# Altium PCB Intelligent_Agriculture_Power.PcbDoc
Units mil, origin at the board's own origin, x right, y up, seen from the top; angles counter-clockwise.
Board outline 3925 x 3925 mil, 2 copper layers (Top Layer, Bottom Layer); 35 components, 24 nets, 96 pads, 10 vias.
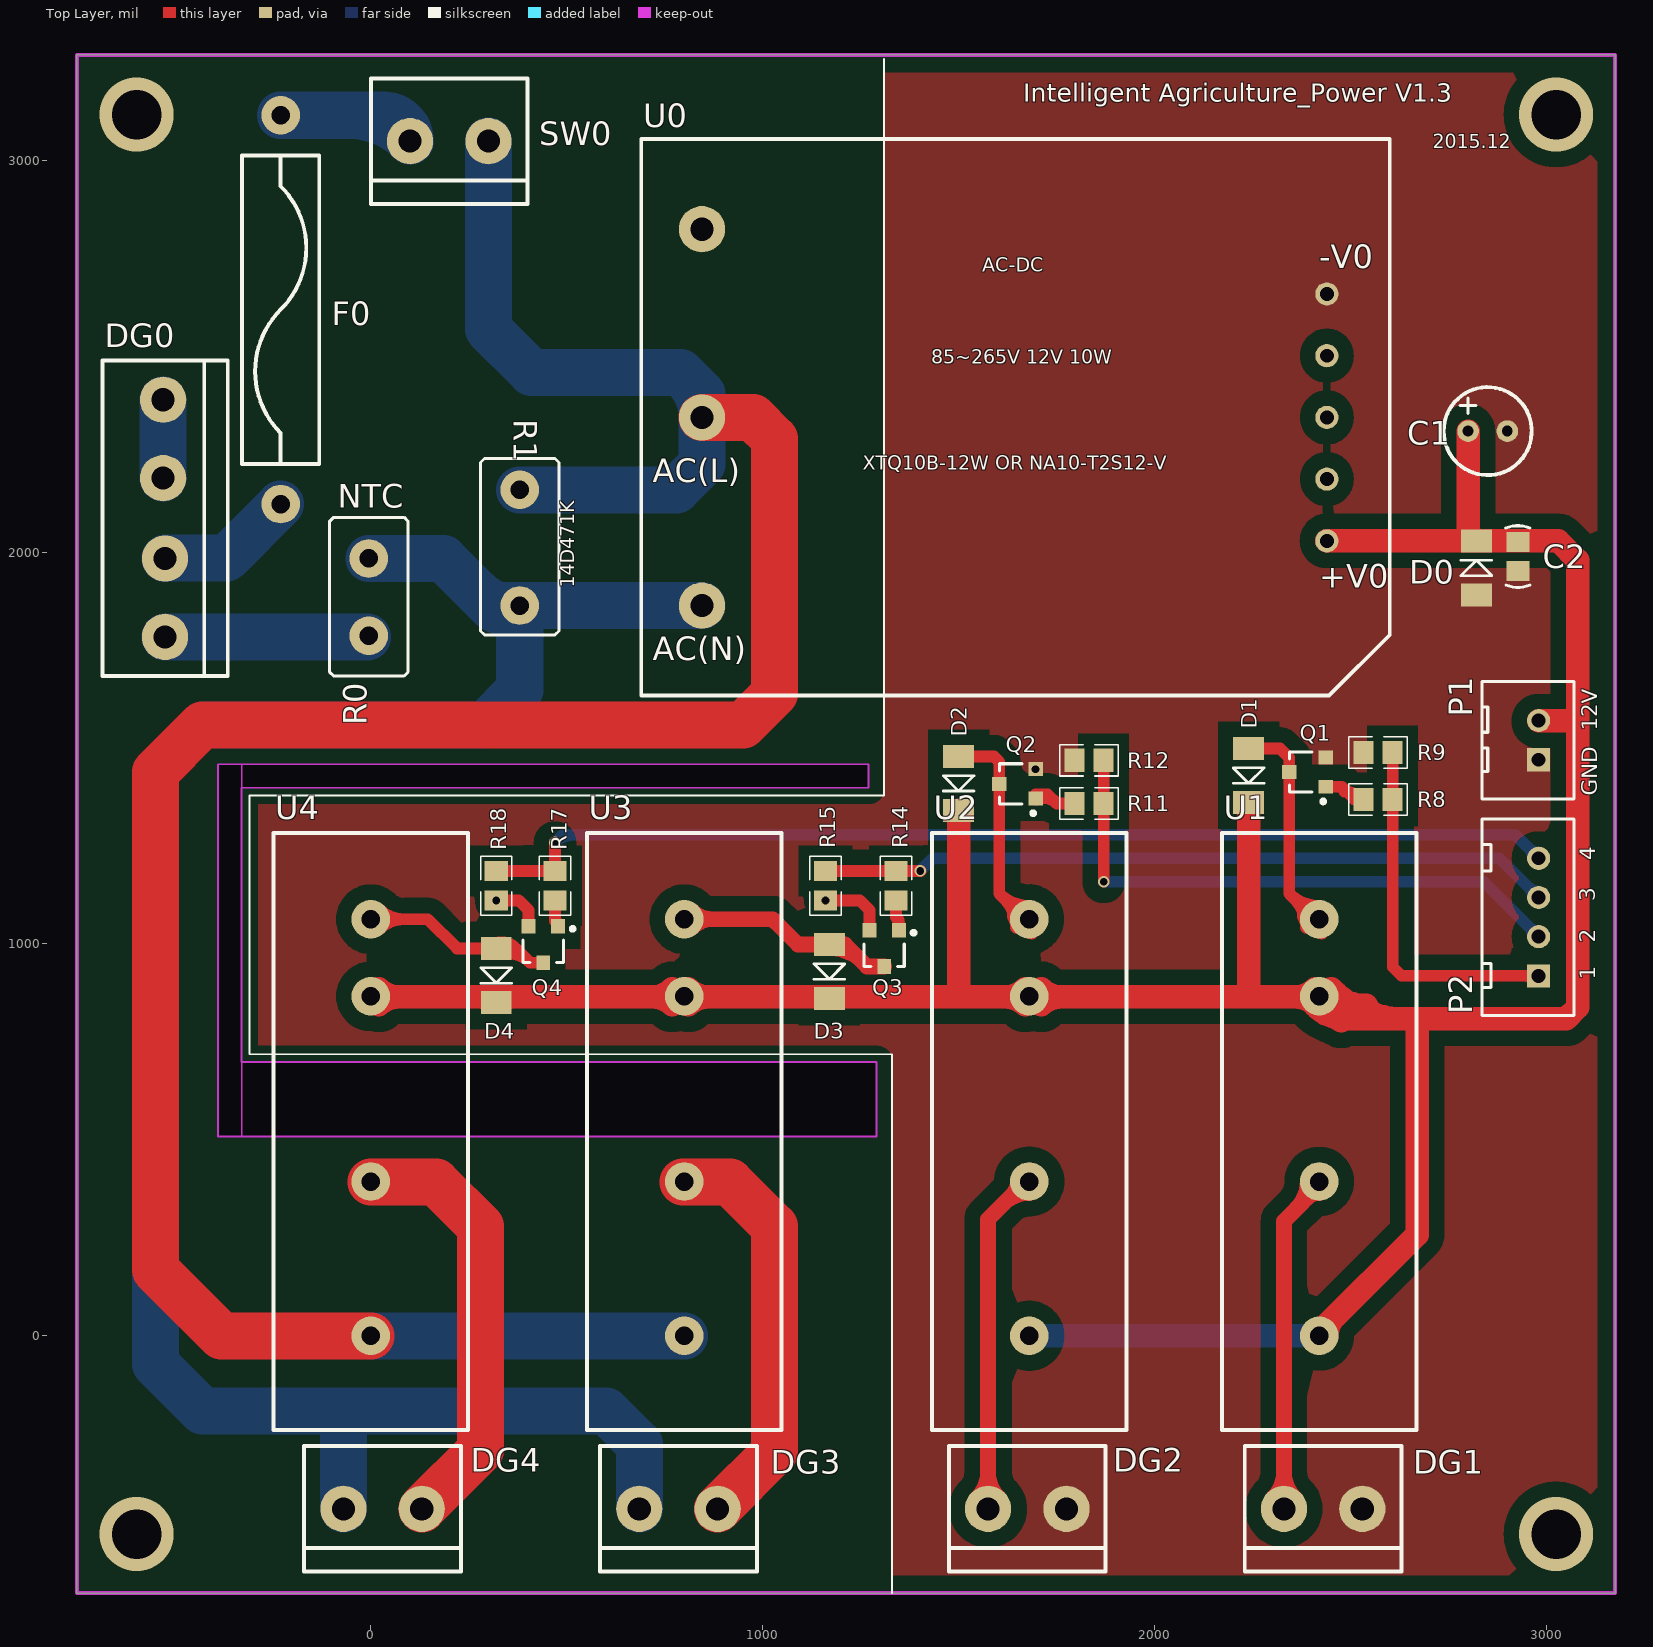
[diagram p0: Top Layer view]
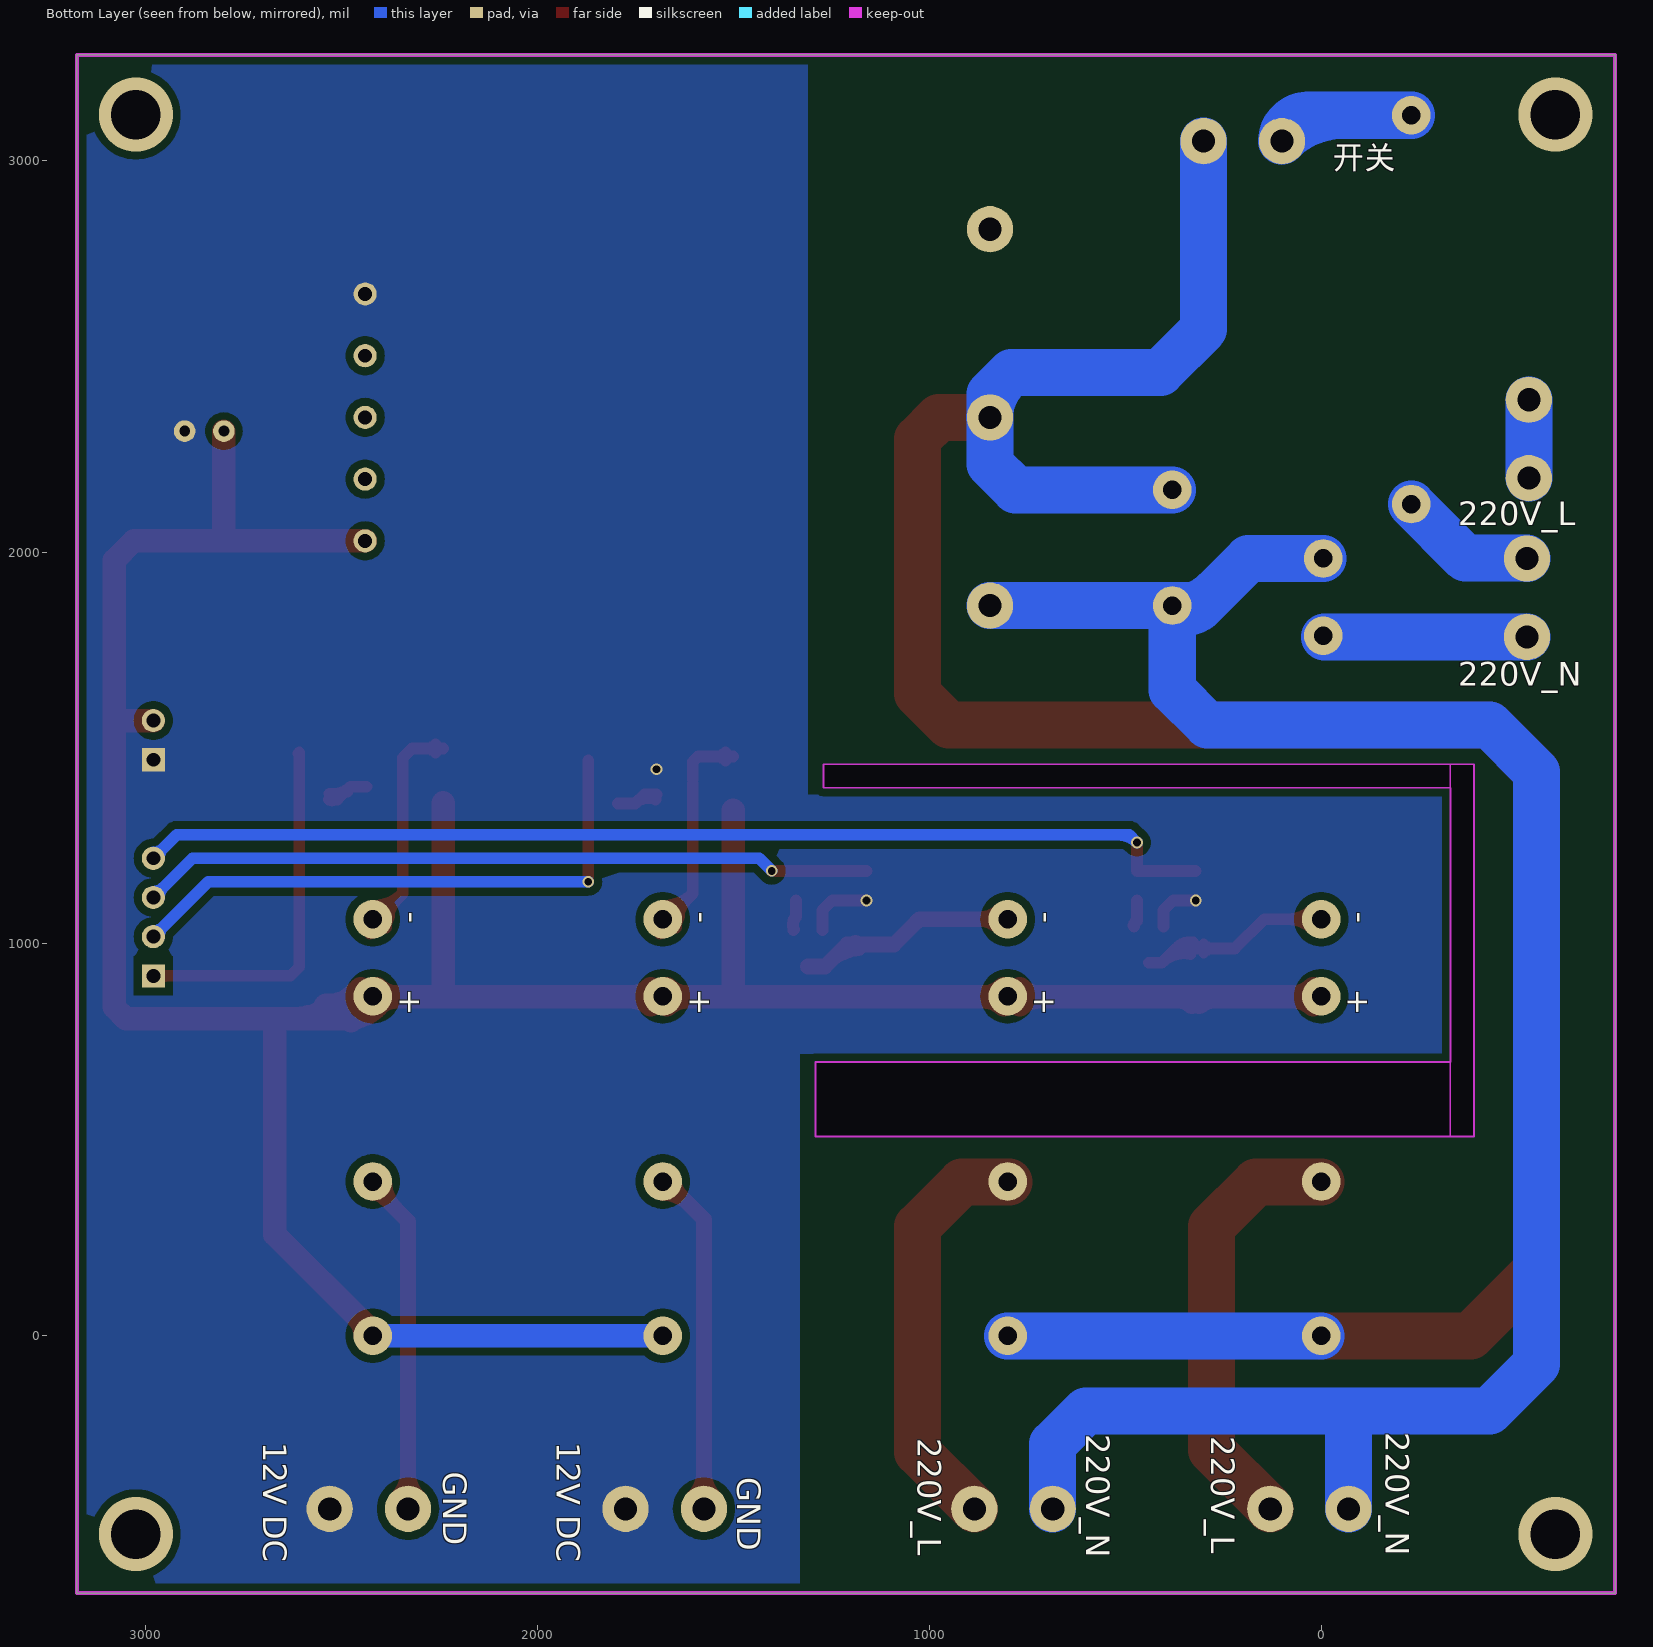
[diagram p1: Bottom Layer view, seen from below]

## Layer stack, top to bottom
Top Layer: signal copper 1.4
Dielectric: dielectric 12.6, FR-4, Dk 4.8
Bottom Layer: signal copper 1.4

## Board outline
-750,-656.54 3175,-656.54 3175,3268.46 -750,3268.46
cut-out: -330,508.46 1290,508.46 1290,698.46 -330,698.46
cut-out: -330,1458.46 -330,1398.46 1270,1398.46 1270,1458.46
cut-out: -390,1458.46 -390,508.46 -330,508.46 -330,1458.46

## Design rules (kind name [scope] priority, off if disabled: settings)
Clearance [All] p1: gap=20
PolygonConnect [All] p1: connectstyle=Direct reliefconductorwidth=10 reliefentries=4 polygonreliefangle="90 Angle"
RoutingVias [All] p1: holewidth=28 width=50 viastyle="Through Hole" minholewidth=28 minwidth=50 maxholewidth=28 maxwidth=50
SilkscreenOverComponentPads SilkToSolderMaskClearance [IsPad] p1: minsilkscreentomaskgap=10
SolderMaskExpansion [All] p1: expansion=4
Width [All] p1: maxlimit=120 minlimit=30 preferedwidth=30
27 further rules are at their usual default settings.

## Components (designator, comment, footprint, x,y, rotation, side; value= is the part's Value field where it differs from the comment)
C1 "Cap Pol1" C-RB-2.54 2850,2308.46 r0 top
C2 "Cap" C-RAD-0805 2927,1988.46 r270 top
D0 "Diode" DIODE-1206 2821,1890.46 r90 top
D1 "Diode" DIODE-1206 2240,1498.46 r270 top
D2 "Diode" DIODE-1206 1500,1478.46 r270 top
D3 "Diode" DIODE-1206 1170,998.46 r270 top
D4 "Diode" DIODE-1206 320,988.46 r270 top
DG0 "Header 4" DG301-4P -530,2088.46 r90 top
DG1 "Header 2" DG301-2P 2435,-436.54 r0 top
DG2 "Header 2" DG301-2P 1680,-436.54 r0 top
DG3 "Header 2" DG301-2P 790,-436.54 r0 top
DG4 "Header 2" DG301-2P 35,-436.54 r0 top
F0 "Fuse" FUSE-20*5*2A -230,2618.46 r90 top
P1 "Header 2" HDR2X1_B1 2980,1570 r270 top
P2 "Header 4" HDR4X1_B1 2980,1218.46 r270 top
Q1 "S8050" SOT-23 2390,1438.46 r90 top
Q2 "S8050" SOT-23 1650,1408.46 r90 top
Q3 "S8050" SOT-23 1310,988.46 r180 top
Q4 "S8050" SOT-23 440,998.46 r180 top
R0 "NTC" "NTC 5D-9" 0,1883.46 r90 top
R1 "MOV" 14D471K 380,1863.46 r90 top
R8 "Res1" 0805-1 2570,1368.46 r0 top
R9 "Res1" 0805-1 2570,1488.46 r180 top
R11 "Res1" 0805-1 1832.6,1358.46 r0 top
R12 "Res1" 0805-1 1832.6,1468.46 r180 top
R14 "Res1" 0805-1 1340,1148.46 r90 top
R15 "Res1" 0805-1 1160,1148.46 r270 top
R17 "Res1" 0805-1 470,1148.46 r90 top
R18 "Res1" 0805-1 320,1148.46 r270 top
SW0 "Header 2" DG301-2P 205,3053.46 r0 top
U0 "ACDC_12V10W" ACDC_XTQ10B-12W 845,2343.46 r0 top
U1 "RL-GJ-5FA-L" RL-GJ-5-L 2420,0 r90 top
U2 "RL-GJ-5FA-L" RL-GJ-5-L 1680,0 r90 top
U3 "RL-GJ-5-L" RL-GJ-5-L 800,0 r90 top
U4 "RL-GJ-5-L" RL-GJ-5-L 0,0 r90 top

## Footprints (in the part's own frame and the unit in brackets; to place one, negate y for a bottom-side part, rotate by r counter-clockwise, add the part's x,y. Pads: shape width x height; smd on the part's side, far side on the other; paste and mask are expansions set on the pad)
14D471K [mm]
  round 2.5 hole 1.2: 1(0,0) 2(7.5,0)
  silkscreen extent -1.91,-2.54 9.53,2.54
0805-1 [mm]
  rect 1.3x1.5 smd: 1(-0.95,0) 2(0.95,0)
  silkscreen extent -1.91,-1.02 1.91,1.02, body extent -1.14,-0.51 1.14,0.51, height 1
ACDC_XTQ10B-12W [mm]
  round 3 hole 1.5: 1(0,12.2) 2(0,0) 3(0,-12.2)
  round 1.5 hole 0.9: 4(40.5,8) 5(40.5,4) 6(40.5,0) 7(40.5,-4) 8(40.5,-8)
  silkscreen extent -3.94,-18.03 44.58,18.03
C-RAD-0805 [mm]
  rect 1.3x1.5 smd: 1(-0.95,0) 2(0.95,0)
  silkscreen extent -2,-0.79 2,0.79, body extent -1.27,-0.64 1.27,0.64, height 0.9
C-RB-2.54 [mm]
  round 1.4 hole 0.7: 1(-1.27,0) 2(1.27,0)
  silkscreen extent -2.85,-2.85 2.85,2.85
DG301-2P [mm]
  round 3 hole 1.5: 1(-2.667,-0.127) 2(2.413,-0.127)
  silkscreen extent -5.21,-4.19 4.95,3.94
DG301-4P [mm]
  round 3 hole 1.5: 1(-7.747,-0.127) 2(-2.667,-0.127) 3(2.54,0) 4(7.62,0)
  silkscreen extent -10.29,-4.19 10.16,3.94
DIODE-1206 [mm]
  rect 1.5x2 smd: 1(0,0) 2(3.5,0)
  silkscreen extent 1.25,-1 2.25,1
FUSE-20*5*2A [mm]
  round 2.5 hole 1.2: 1(-12.6,0) 2(12.6,0)
  silkscreen extent -10,-2.5 10,2.5
HDR2X1_B1 [mm]
  rect 1.5x1.5 hole 0.9: 1(2.54,0)
  round 1.5 hole 0.9: 2(0,0)
  silkscreen extent -2.54,-3.68 5.08,2.29, body extent -2.48,-3.56 5.02,2.16, height 1.5
HDR4X1_B1 [mm]
  rect 1.5x1.5 hole 0.9: 1(7.62,0)
  round 1.5 hole 0.9: 2(5.08,0) 3(2.54,0) 4(0,0)
  silkscreen extent -2.54,-3.69 10.2,2.29, body extent -2.41,-3.62 10.03,2.1, height 1.5
"NTC 5D-9" [mm]
  round 2.5 hole 1.2: 1(-2.46,0.127) 2(2.54,0.127)
  silkscreen extent -5.08,-2.41 5.21,2.67
RL-GJ-5-L [mm]
  round 2.5 hole 1.2: 1(0,0) 2(10,0) 3(22,0) 4(27,0)
  silkscreen extent -6.1,-6.3 32.6,6.3
SOT-23 [mm]
  rect 0.9x0.95 smd: 1(-0.95,-1.175) 2(0.95,-1.175) 3(0,1.175)
  silkscreen extent -2.03,-1.14 1.3,1.18

## Part data
C1: library part "Cap P", "µç½âµ"
C2: "无极性"
D0 D1 D2 D3 D4: library part Dio, "二极"
DG0 P1 P2: "接插"
DG1 DG2 DG3 DG4 SW0: library part Head, "接插"
F0: "保险丝"
Q1 Q2 Q3 Q4: library part BCP, "NPN三极"
R0: "ÈÈÃôµ"
R1: "Ñ¹Ãôµ"
R8 R9 R11 R12 R14 R15 R17 R18: "ÌùÆ¬µ"
U0: library part ACD, "ACDC模块_220VAC转12V"
U1 U2: "3-38V DC-DC固态继"
U3 U4: "3-38V DC-AC固态继"

## Free pads (board coordinates)
  round 188.98 hole 125.98: 0(-597.52,3115.98) 1(3024.53,3115.98) 2(3024.53,-506.06) 3(-597.52,-506.06)

## Via types
v1: diameter 30, hole 20, Top Layer to Bottom Layer, tented both sides, 6 vias
v2: diameter 188.98, hole 125.98, Top Layer to Bottom Layer, tented both sides, 4 vias

## Nets (pads, with @x,y where several pads share a name; then routed paths per layer and width w, separated by ;. In a path a pad name is that pad's centre, name@x,y a point inside that pad or via, vN(x,y) a via of type N, cw(c..) or ccw(c..) an arc to the next point about the centre after c; other vN are vias at no path point)
GND: C1.2 C2.2 D0.1 DG1.2 DG2.2 P1.1 Q1.2 Q2.2 Q3.2 Q4.2 R9.2 R12.2 R15.2 R18.2 U0.4 | length 308.4
  Top Layer w30: v1(320,1111.06) 377.4,1111.06 402.6,1085.87 Q4.2 ; v1(1160,1111.06) 1247.4,1111.06 1272.6,1085.87 Q3.2
  other v1: 1696.26,1445.87
L220V: R1.2 SW0.2 U0.2 U3.1 U4.1 | length 7311.2
  Top Layer w120: U4.1 -381.54,0 -550,168.46 -550,1438.46 -430,1558.46 950,1558.46 1030,1638.46 1030,2288.46 975,2343.46 U0.2
  Bottom Layer w120: U4.1 U3.1 ; SW0.2 300,2568.46 410,2458.46 790,2458.46 845,2403.46 U0.2 845,2224.02 779.72,2158.74 R1.2 ; 804.19,2444.28 cw(c703.37,2343.46) U0.2@845.94,2343.46 ; 804.19,2444.28 cw(c703.37,2343.46) U0.2@845.94,2343.46 ; 804.19,2444.28 cw(c703.37,2343.46) U0.2@845.94,2343.46
N220V: DG3.1 DG4.1 R0.2 R1.1 U0.3 | length 5994.7
  Bottom Layer w120: DG4.1 -70,-201.54 ; R0.2 185,1983.46 305,1863.46 ; DG3.1 685,-276.54 600,-191.54 -430,-191.54 -550,-71.54 -550,1438.46 -430,1558.46 290,1558.46 380,1648.46 R1.1 ; U0.3@844.68,1863.46 R1.1 ; 270.38,1898.08 ccw(c380,2007.7) R1.1@380,1852.68 ; 270.38,1898.08 ccw(c380,2007.7) R1.1@380,1852.68 ; 270.38,1898.08 ccw(c380,2007.7) R1.1@380,1852.68 ; 305,1863.46 ccw(c351.1,1909.56) R1.1@385.73,1854.32 ; 305,1863.46 ccw(c351.1,1909.56) R1.1@385.73,1854.32 ; 305,1863.46 ccw(c351.1,1909.56) R1.1@385.73,1854.32 ; 305,1863.46 R1.1
NetD1_1: D1.1 Q1.3 U1.4 | length 1458.3
  Top Layer w30: D1.1 2320,1498.46 2343.74,1474.72 Q1.3 2343.74,1128.35 ; 2369.31,1102.78 cw(c2329.52,1062.99) U1.4@2385.79,1062.99 ; U1.4@2377.75,1072.67 ccw(c2439.66,1089.25) U1.4@2426.8,1026.47 ; U1.4@2399.42,1094.34 cw(c2382.83,1032.43) U1.4@2445.62,1045.29 ; U1.4@2419.74,1097.2 cw(c2418.93,1203.53) 2343.74,1128.34 ; U1.4@2430,1042.09 2343.74,1128.35 ; D1.1@2260.11,1488.19 cw(c2284.91,1463.39) 2284.91,1498.46 ; D1.1@2260.11,1488.19 cw(c2284.91,1463.39) 2284.91,1498.46 ; D1.1@2260.11,1488.19 cw(c2284.91,1463.39) 2284.91,1498.46 ; D1.1@2260.11,1508.74 ccw(c2284.91,1533.54) 2284.91,1498.46 ; D1.1@2260.11,1508.74 ccw(c2284.91,1533.54) 2284.91,1498.46 ; D1.1@2260.11,1508.74 ccw(c2284.91,1533.54) 2284.91,1498.46 ; 2354.79,1117.29 ccw(c2430,1192.5) 2430,1086.14 cw(c2430,1192.5) 2354.79,1117.29 ; 2354.79,1117.29 cw(c2279.59,1042.09) 2385.94,1042.09 ccw(c2279.59,1042.09) 2354.79,1117.29 ; 2381.42,1099.16 cw(c2369.09,1053.14) 2415.86,1062.19 ccw(c2369.09,1053.14) 2381.42,1099.16
NetD2_1: D2.1 Q2.3 U2.4 | length 1434.1
  Top Layer w30: D2.1 1590,1478.46 1603.74,1464.72 Q2.3@1603.74,1418.46 ; Q2.3 1603.74,1128.35 ; 1629.31,1102.78 cw(c1589.52,1062.99) U2.4@1645.79,1062.99 ; U2.4@1637.75,1072.67 ccw(c1699.66,1089.25) U2.4@1686.8,1026.47 ; U2.4@1659.42,1094.34 cw(c1642.83,1032.43) U2.4@1705.62,1045.29 ; U2.4@1679.74,1097.2 cw(c1678.93,1203.53) 1603.74,1128.34 ; U2.4@1690,1042.09 1603.74,1128.35 ; D2.1@1520.11,1468.19 cw(c1544.91,1443.39) 1544.91,1478.46 ; D2.1@1520.11,1468.19 cw(c1544.91,1443.39) 1544.91,1478.46 ; D2.1@1520.11,1468.19 cw(c1544.91,1443.39) 1544.91,1478.46 ; D2.1@1520.11,1488.74 ccw(c1544.91,1513.54) 1544.91,1478.46 ; D2.1@1520.11,1488.74 ccw(c1544.91,1513.54) 1544.91,1478.46 ; D2.1@1520.11,1488.74 ccw(c1544.91,1513.54) 1544.91,1478.46 ; 1614.79,1117.29 ccw(c1690,1192.5) 1690,1086.14 cw(c1690,1192.5) 1614.79,1117.29 ; 1614.79,1117.29 cw(c1539.59,1042.09) 1645.94,1042.09 ccw(c1539.59,1042.09) 1614.79,1117.29 ; 1641.42,1099.16 cw(c1629.09,1053.14) 1675.86,1062.19 ccw(c1629.09,1053.14) 1641.42,1099.16
NetD3_1: D3.1 Q3.3 U3.4 | length 864.1
  Top Layer w40: U3.4 1025.47,1062.99 1046.38,1042.09 1090,998.46 D3.1 1210,998.46 1266.26,942.2 Q3.3 ; U3.4@820.66,1042.34 cw(c870.53,992.47) 870.53,1062.99 cw(c870.53,1133.52) U3.4@820.66,1083.65 ; D3.1@1188.09,1003.23 ccw(c1235.22,1030.44) 1221.14,977.87 ; D3.1@1179.84,988.94 cw(c1179.84,893.13) 1247.59,960.88 ccw(c1179.84,893.13) D3.1@1179.84,988.94
NetD4_1: D4.1 Q4.3 U4.4 | length 1138.3
  Top Layer w30: U4.4 145.47,1062.99 220,988.46 D4.1 370,988.46 406.26,952.2 ; U4.4@24.19,1038.8 cw(c82.6,980.4) 82.6,1062.99 cw(c82.6,1145.59) U4.4@24.19,1087.18 ; Q4.3 406.26,952.2 ; 275.09,988.46 cw(c275.09,953.39) D4.1@299.89,978.19 ; 275.09,988.46 ccw(c275.09,1023.54) D4.1@299.89,998.74 ; 275.09,988.46 ccw(c275.09,1023.54) D4.1@299.89,998.74 ; 275.09,988.46 cw(c275.09,953.39) D4.1@299.89,978.19 ; 275.09,988.46 ccw(c275.09,1023.54) D4.1@299.89,998.74 ; 275.09,988.46 cw(c275.09,953.39) D4.1@299.89,978.19 ; 364.91,988.46 ccw(c364.91,953.39) 340.11,978.19 cw(c364.91,953.39) 364.91,988.46 ; 364.91,988.46 cw(c364.91,1023.54) 340.11,998.74 ccw(c364.91,1023.54) 364.91,988.46 ; 406.26,952.21 ccw(c349.07,895.02) 332.77,974.24 cw(c349.07,895.02) 406.26,952.21 ; D4.1@326.72,1003.62 cw(c335.63,960.33) 366.88,991.58 ccw(c335.63,960.33) D4.1@326.72,1003.62
NetDG0_1: DG0.1 R0.1 | length 516.9
  Bottom Layer w120: DG0.1 R0.1@-8.15,1783.46
NetDG0_2: DG0.2 F0.1 | length 352.5
  Bottom Layer w120: DG0.2 -524,1984.46 -367.94,1984.46 F0.1
NetDG0_3: DG0.3 DG0.4 | length 200
  Bottom Layer w120: DG0.3 DG0.4
NetDG1_1: DG1.1 U1.2 | length 1430.5
  Top Layer w40: DG1.1 2330,292.48 U1.2@2430,392.48 ; 2362.2,324.68 ccw(c2293.17,393.7) U1.2@2390.79,393.7 ; 2389.29,351.77 cw(c2420,321.05) U1.2@2420,364.49 ; DG1.1@2302.38,-413.92 ccw(c2235.71,-347.25) 2330,-347.25 ; DG1.1@2302.38,-413.92 ccw(c2235.71,-347.25) 2330,-347.25 ; DG1.1@2302.38,-413.92 ccw(c2235.71,-347.25) 2330,-347.25 ; 2330,-347.25 ccw(c2424.29,-347.25) DG1.1@2357.62,-413.92 ; 2330,-347.25 ccw(c2424.29,-347.25) DG1.1@2357.62,-413.92 ; 2330,-347.25 ccw(c2424.29,-347.25) DG1.1@2357.62,-413.92
NetDG2_1: DG2.1 U2.2 | length 1500.7
  Top Layer w40: DG2.1 1575,297.48 U2.2@1670,392.48 ; 1615.14,337.62 cw(c1680,272.77) U2.2@1680,364.49 ; 1636.34,358.82 ccw(c1601.46,393.7) U2.2@1650.79,393.7 ; DG2.1@1547.38,-413.92 ccw(c1480.71,-347.25) 1575,-347.25 ; DG2.1@1547.38,-413.92 ccw(c1480.71,-347.25) 1575,-347.25 ; DG2.1@1547.38,-413.92 ccw(c1480.71,-347.25) 1575,-347.25 ; 1575,-347.25 ccw(c1669.29,-347.25) DG2.1@1602.62,-413.92 ; 1575,-347.25 ccw(c1669.29,-347.25) DG2.1@1602.62,-413.92 ; 1575,-347.25 ccw(c1669.29,-347.25) DG2.1@1602.62,-413.92 ; 1637.47,359.95 ccw(c1604.94,392.48) 1650.94,392.48 cw(c1604.94,392.48) 1637.47,359.95
NetDG3_2: DG3.2 U3.2 | length 1061.3
  Top Layer w120: U3.2@795.98,392.48 915.98,392.48 1030,278.46 1030,-296.54 DG3.2
NetDG4_2: DG4.2 U4.2 | length 1109.4
  Top Layer w120: U4.2@0,392.48 165.98,392.48 280,278.46 280,-291.54 DG4.2
NetF0_2: F0.2 SW0.1 | length 1196.3
  Bottom Layer w120: F0.2 33.94,3114.53 ; SW0.1 33.94,3114.53 ; -57.21,3114.53 cw(c-57.21,2891.26) SW0.1@100.67,3049.13 ; -57.21,3114.53 cw(c-57.21,2891.26) SW0.1@100.67,3049.13 ; -57.21,3114.53 cw(c-57.21,2891.26) SW0.1@100.67,3049.13 ; 33.94,3114.53 cw(c33.94,3047.51) SW0.1@100.94,3048.48 ; 33.94,3114.53 cw(c33.94,3047.51) SW0.1@100.94,3048.48 ; 33.94,3114.53 cw(c33.94,3047.51) SW0.1@100.94,3048.48
NetQ1_1: Q1.1 R8.1 | length 370
  Top Layer w30: Q1.1 2477.4,1401.06 ; R8.1 2510,1368.46 2477.4,1401.06 ; 2477.4,1401.06 ccw(c2522.64,1446.3) 2531.18,1382.9 cw(c2522.64,1446.3) 2477.4,1401.06 ; 2484.05,1388.96 cw(c2476.34,1328.96) R8.1@2524.22,1365.93 ; 2484.05,1388.96 cw(c2476.34,1328.96) R8.1@2524.22,1365.93 ; 2484.05,1388.96 cw(c2476.34,1328.96) R8.1@2524.22,1365.93
NetQ2_1: Q2.1 R11.1 | length 338.9
  Top Layer w30: Q2.1@1696.26,1381.06 1727.4,1381.06 ; R11.1 1750,1358.46 ; Q2.1@1698.3,1368.56 cw(c1716.65,1325.12) 1750,1358.47 ; Q2.1@1698.3,1368.56 cw(c1716.65,1325.12) 1750,1358.47 ; Q2.1@1698.3,1368.56 cw(c1716.65,1325.12) 1750,1358.47 ; 1727.4,1381.06 ccw(c1727.4,1341.66) 1699.19,1369.17 cw(c1727.4,1341.66) 1727.4,1381.06 ; 1727.4,1381.06 1750,1358.46
NetQ3_1: Q3.1 R14.1 | length 147.6
  Top Layer w30: R14.1 1340,1068.46 ; Q3.1 1347.4,1061.06 1340,1068.46 ; 1340,1068.46 cw(c1320.81,1049.28) 1344.98,1036.94 ccw(c1320.81,1049.28) 1340,1068.46
NetQ4_1: Q4.1 R17.1 | length 119.4
  Top Layer w30: R17.1 470,1058.46 477.4,1051.06 Q4.1 ; 470,1070.14 ccw(c501.83,1070.14) 479.32,1047.63 cw(c501.83,1070.14) 470,1070.14
RELAY1: P2.1 R8.2 R9.1 | length 1098.3
  Top Layer w30: R9.1@2610,1485.87 R9.1 R8.2 2607.4,941.06 2630,918.46 P2.1 ; 2944.93,918.46 cw(c2944.93,883.39) P2.1@2969.73,908.19 ; 2944.93,918.46 ccw(c2944.93,953.54) P2.1@2969.73,928.74 ; 2944.93,918.46 ccw(c2944.93,953.54) P2.1@2969.73,928.74 ; 2944.93,918.46 cw(c2944.93,883.39) P2.1@2969.73,908.19 ; 2944.93,918.46 ccw(c2944.93,953.54) P2.1@2969.73,928.74 ; 2944.93,918.46 cw(c2944.93,883.39) P2.1@2969.73,908.19
RELAY2: P2.2 R11.2 R12.1 | length 1788.2
  Top Layer w30: R12.1 R11.2 ; R11.2 v1(1870,1158.46) R11.2
  Bottom Layer w30: v1(1870,1158.46) 2840,1158.46 P2.2 ; 2955.2,1043.26 ccw(c2980,1068.06) 2980,1032.99 cw(c2980,1068.06) 2955.2,1043.26 ; 2955.2,1043.26 cw(c2930.4,1018.46) 2965.47,1018.46 ccw(c2930.4,1018.46) 2955.2,1043.26
RELAY3: P2.3 R14.2 R15.1 | length 1985.5
  Top Layer w30: R15.1 v1@1402.6,1185.87
  Bottom Layer w30: v1(1402,1186.46) 1434,1218.46 2880,1218.46 P2.3 ; 2955.2,1143.26 ccw(c2980,1168.06) 2980,1132.99 cw(c2980,1168.06) 2955.2,1143.26 ; 2955.2,1143.26 cw(c2930.4,1118.46) 2965.47,1118.46 ccw(c2930.4,1118.46) 2955.2,1143.26
RELAY4: P2.4 R17.2 R18.1 | length 3036.8
  Top Layer w30: R18.1 R17.2 v1(470,1258.46)
  Bottom Layer w30: P2.4 2920,1278.46 490,1278.46 v1(470,1258.46) ; v1(470,1258.46) cw(c518.28,1210.18) 518.28,1278.46 ; v1(470,1258.46) cw(c518.28,1210.18) 518.28,1278.46 ; v1(470,1258.46) cw(c518.28,1210.18) 518.28,1278.46 ; 2955.2,1243.26 ccw(c2980,1268.06) 2980,1232.99 cw(c2980,1268.06) 2955.2,1243.26 ; 2955.2,1243.26 cw(c2930.4,1218.46) 2965.47,1218.46 ccw(c2930.4,1218.46) 2955.2,1243.26
VCC12V: C1.1 C2.1 D0.2 D1.2 D2.2 D3.2 D4.2 P1.2 U0.8 U1.1 U1.3 U2.1 U2.3 U3.3 U4.3 | length 11518.6
  Top Layer w60: U4.3@0,864.92 790,864.92 1500,864.92 ; U4.3@13.59,879.73 ccw(c49.33,915.47) 49.33,864.92 ; 750.67,864.92 ccw(c750.67,915.47) U3.3@786.41,879.73 ; U3.3@813.59,879.73 ccw(c849.33,915.47) 849.33,864.92 ; D2.2 1500,864.92 ; 1630.67,864.92 ccw(c1630.67,915.47) U2.3@1666.41,879.73 ; U2.3@1693.59,879.73 ccw(c1729.33,915.47) 1729.33,864.92 ; D1.2 2240,864.92 ; 2370.67,864.92 ccw(c2370.67,915.47) U1.3@2406.41,879.73 ; U1.3@2420,846.93 cw(c2420,779.35) 2467.79,827.14 ; U1.1@2430,18.46 2670,258.46 2670,788.46 ; U1.3@2430,845.24 2466.77,808.46 ; U1.3@2432.78,880.49 ccw(c2531.46,991.23) 2539.99,843.15 ; U1.3@2439.12,837.34 cw(c2483.57,702.92) 2554.36,825.53 ; U1.1@2439.21,0 cw(c2506.03,0) 2458.78,47.25 ; U1.3@2439.21,866.14 ccw(c2511.92,866.14) 2460.51,814.73 ; U0.8 D0.2@2820.76,2028.5 ; U1.3@2457.32,855.02 ccw(c2497.18,840.58) 2475.98,803.86 ; C1.1 2800,2049.26 D0.2@2820.76,2028.5 ; D0.2 D0.2@2820.76,2028.5 ; P1.2 3060,1570 ; 3060,1568.46 3080,1588.46 ; 70.15,864.92 ccw(c70.15,794.78) 20.55,844.38 cw(c70.15,794.78) 70.15,864.92 ; 70.15,864.92 cw(c70.15,935.07) 20.55,885.47 ccw(c70.15,935.07) 70.15,864.92 ; 276.89,864.92 cw(c276.89,817.4) D4.2@310.49,851 ; 276.89,864.92 cw(c276.89,817.4) D4.2@310.49,851 ; 276.89,864.92 cw(c276.89,817.4) D4.2@310.49,851 ; D4.2@329.51,851 cw(c363.11,817.4) 363.11,864.92 ; D4.2@329.51,851 cw(c363.11,817.4) 363.11,864.92 ; D4.2@329.51,851 cw(c363.11,817.4) 363.11,864.92 ; 719.85,864.92 ccw(c719.85,935.07) 769.45,885.47 cw(c719.85,935.07) 719.85,864.92 ; 719.85,864.92 cw(c719.85,794.78) 769.45,844.38 ccw(c719.85,794.78) 719.85,864.92 ; 860.15,864.92 ccw(c860.15,794.78) 810.55,844.38 cw(c860.15,794.78) 860.15,864.92 ; 860.15,864.92 cw(c860.15,935.07) 810.55,885.47 ccw(c860.15,935.07) 860.15,864.92 ; 1500,864.92 2240,864.92 ; 1619.85,864.92 ccw(c1619.85,935.07) 1669.45,885.47 cw(c1619.85,935.07) 1619.85,864.92 ; 1619.85,864.92 cw(c1619.85,794.78) 1669.45,844.38 ccw(c1619.85,794.78) 1619.85,864.92 ; 1760.15,864.92 ccw(c1760.15,794.78) 1710.55,844.38 cw(c1760.15,794.78) 1760.15,864.92 ; 1760.15,864.92 cw(c1760.15,935.07) 1710.55,885.47 ccw(c1760.15,935.07) 1760.15,864.92 ; 2240,864.92 2430,864.92 2486.46,808.46 ; 2359.85,864.92 ccw(c2359.85,935.07) 2409.45,885.47 cw(c2359.85,935.07) 2359.85,864.92 ; 2359.85,864.92 cw(c2359.85,794.78) 2409.45,844.38 ccw(c2359.85,794.78) 2359.85,864.92 ; 2466.77,808.47 cw(c2497.17,838.87) 2457.09,854.41 ccw(c2497.17,838.87) 2466.77,808.47 ; 2466.77,808.46 2486.46,808.46 ; 2479.6,815.32 ccw(c2430,765.72) 2430,835.87 cw(c2430,765.72) 2479.6,815.32 ; 2479.6,815.32 cw(c2529.2,864.92) 2459.06,864.92 ccw(c2529.2,864.92) 2479.6,815.32 ; 2486.46,808.46 3050,808.46 3080,838.46 3080,1588.46 ; D0.2@2820.76,2028.5 3029.96,2028.5 3080,1978.46 3080,1588.46 ; U1.3@2408.12,843.04 ccw(c2491.59,926.51) 2491.59,808.46 cw(c2491.59,926.51) U1.3@2408.12,843.04 ; U1.3@2424.97,847.58 cw(c2465.26,697.22) 2543.09,832.03 ccw(c2465.26,697.22) U1.3@2424.97,847.58 ; U1.3@2439.21,865.95 ccw(c2508.81,865.27) 2474.01,805 cw(c2508.81,865.27) U1.3@2439.21,865.95 ; U1.3@2450.55,885.47 ccw(c2636.44,1071.36) 2636.44,808.46 cw(c2636.44,1071.36) U1.3@2450.55,885.47
  Bottom Layer w60: U2.1 U1.1
pads on no net: U0.1 U0.5 U0.6 U0.7
copper on no net:
  other v2: -597.52,-506.06 3024.53,-506.06 -597.52,3115.98 3024.53,3115.98

## Polygon pours and split planes (outlines as drawn)
GND on Top Layer "Keep-Out Layer-No Net" (solid, remove dead copper, pour order 6): 1310,3270 1310,1380 -310,1380 -310,720 1330,720 1330,-656.54 3175,-656.54 3175,3268.46
GND on Bottom Layer "Keep-Out Layer-No Net" (solid, remove dead copper, pour order 10): 1310,3268.46 1310,1380 -310,1380 -310,720 1330,720 1330,-656.54 3175,-656.54 3175,3268.46

## Keep-outs
Keep-Out Layer:
  lines w5: -390,508.46 1290,508.46 1290,575.96 1290,630.96 1290,698.46 -330,698.46 -330,1398.46 1270,1398.46 1270,1458.46 -390,1458.46 -390,508.46
  lines w10: -750,-656.54 3175,-656.54 3175,3268.46 -750,3268.46 -750,-656.54

## Silkscreen, mask and mechanical layers (free items; w line width, h text height)
Top Overlay:
  lines w5: -143,718.46 1330,718.46 1330,-656.54 ; -130,718.46 -230,718.46 -310,718.46 -310,1378.46 1310,1378.46 1310,3258.46
  text "Intelligent Agriculture_Power V1.3" at 1665,3133.46 h80
  text "2015.12" at 2710,3018.46 h60
  text "12V" at 3130,1543.46 h40 r90
  text "GND" at 3130,1378.46 h40 r90
  text "4" at 3125,1213.46 h40 r90
  text "3" at 3125,1108.46 h40 r90
  text "2" at 3125,1003.46 h40 r90
  text "1" at 3125,908.46 h40 r90
Bottom Overlay:
  text "开关" at -30,2958.46 h100
  text "220V_L" at -350,2068.46 h60
  text "220V_N" at -350,1658.46 h60
  text "220V_N" at -165,-246.54 h60 r90
  text "220V_N" at 600,-251.54 h60 r90
  text "220V_L" at 280,-256.54 h60 r90
  text "220V_L" at 1030,-261.54 h60 r90
  text "12V DC" at 1950,-271.54 h60 r90
  text "12V DC" at 2700,-271.54 h60 r90
  text "GND" at 2240,-346.54 h60 r90
  text "GND" at 1490,-361.54 h60 r90

## Text inside footprints (layer, text, board x,y; h text height)
R1: Top Overlay "14D471K" at 530,1908.46 h60 r90
U0: Top Overlay "XTQ10B-12W OR NA10-T2S12-V" at 1255,2198.46 h60; Top Overlay "AC(N)" at 720,1723.46 h60; Top Overlay "AC(L)" at 720,2178.46 h60; Top Overlay "-V0" at 2420,2723.46 h60; Top Overlay "+V0" at 2420,1908.46 h60; Top Overlay "AC-DC" at 1560,2703.46 h60; Top Overlay "85~265V 12V 10W" at 1430,2468.46 h60
U1: Bottom Overlay "-" at 2301.89,1082.68 h60 r270; Bottom Overlay "+" at 2301.89,885.83 h60 r270
U2: Bottom Overlay "-" at 1561.89,1082.68 h60 r270; Bottom Overlay "+" at 1561.89,885.83 h60 r270
U3: Bottom Overlay "-" at 681.89,1082.68 h60 r270; Bottom Overlay "+" at 681.89,885.83 h60 r270
U4: Bottom Overlay "-" at -118.11,1082.68 h60 r270; Bottom Overlay "+" at -118.11,885.83 h60 r270